# Altium PCB PrimaryConverterSch-PCB.PcbDoc
Units mm, origin at the board's own origin, x right, y up, seen from the top; angles counter-clockwise.
Board outline 79.76 x 126.49 mm, 2 copper layers (Top Layer, Bottom Layer); 83 components, 51 nets, 297 pads, 240 vias.
Unrouted connection lines stored in the file: 40.
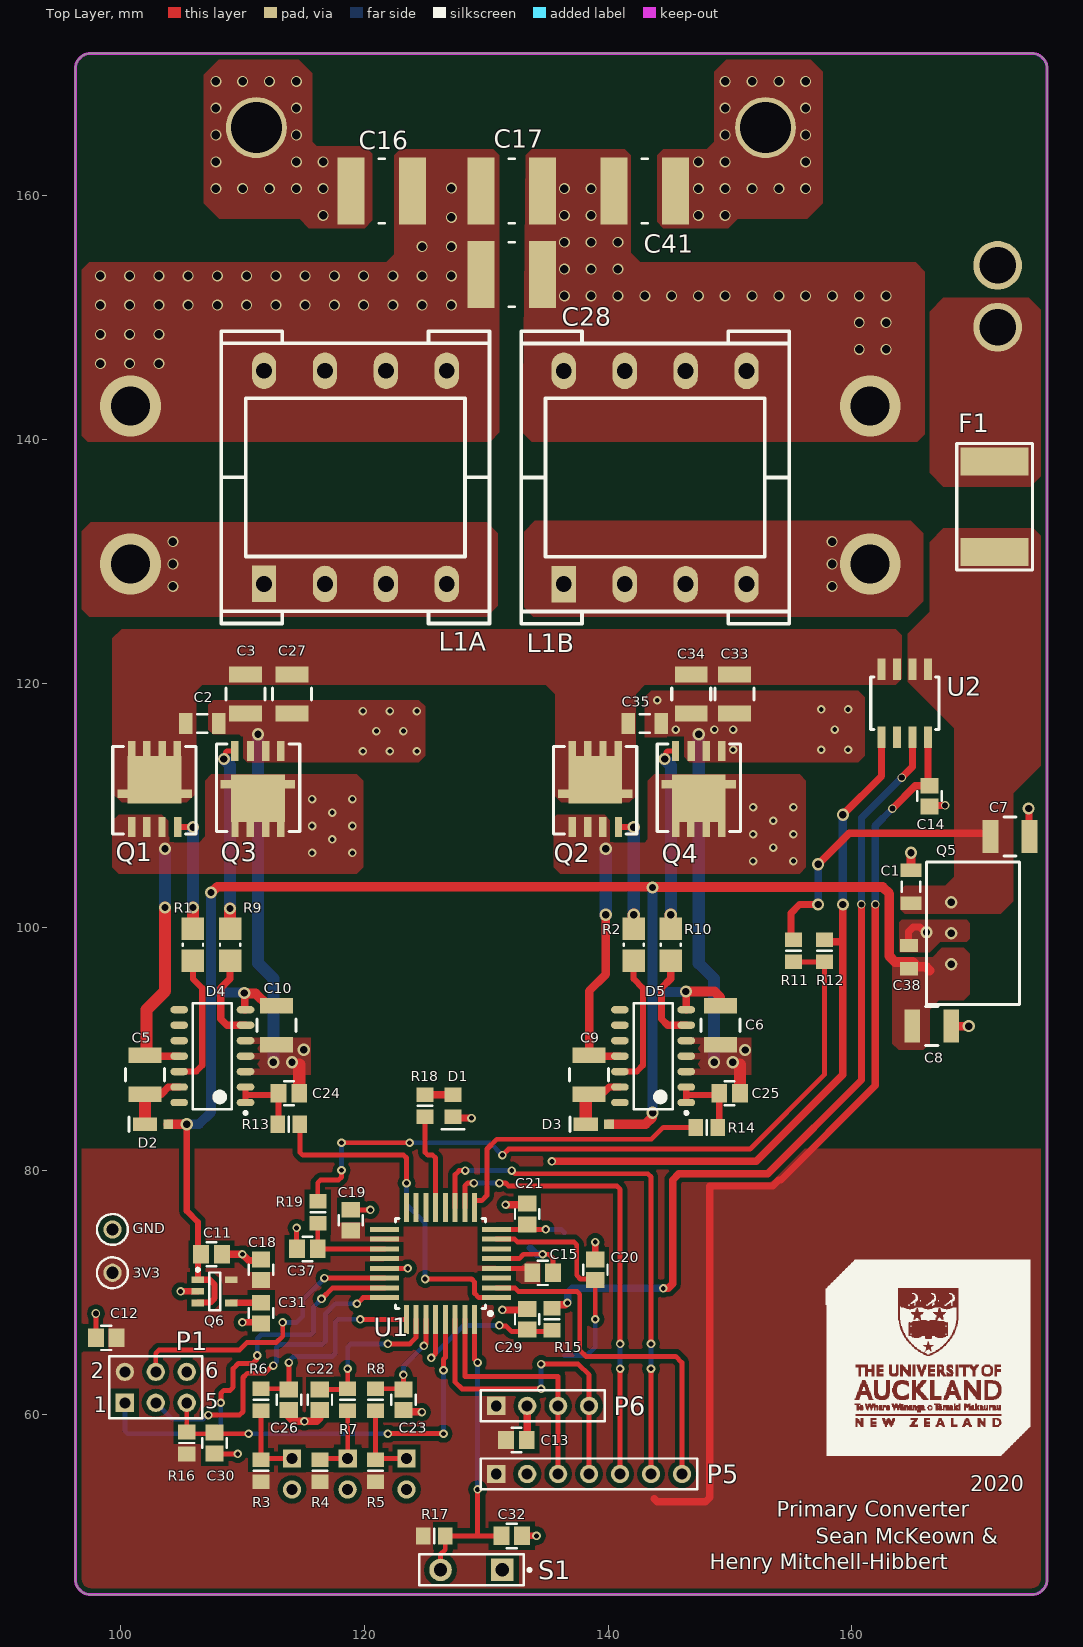
[diagram p0: Top Layer view]
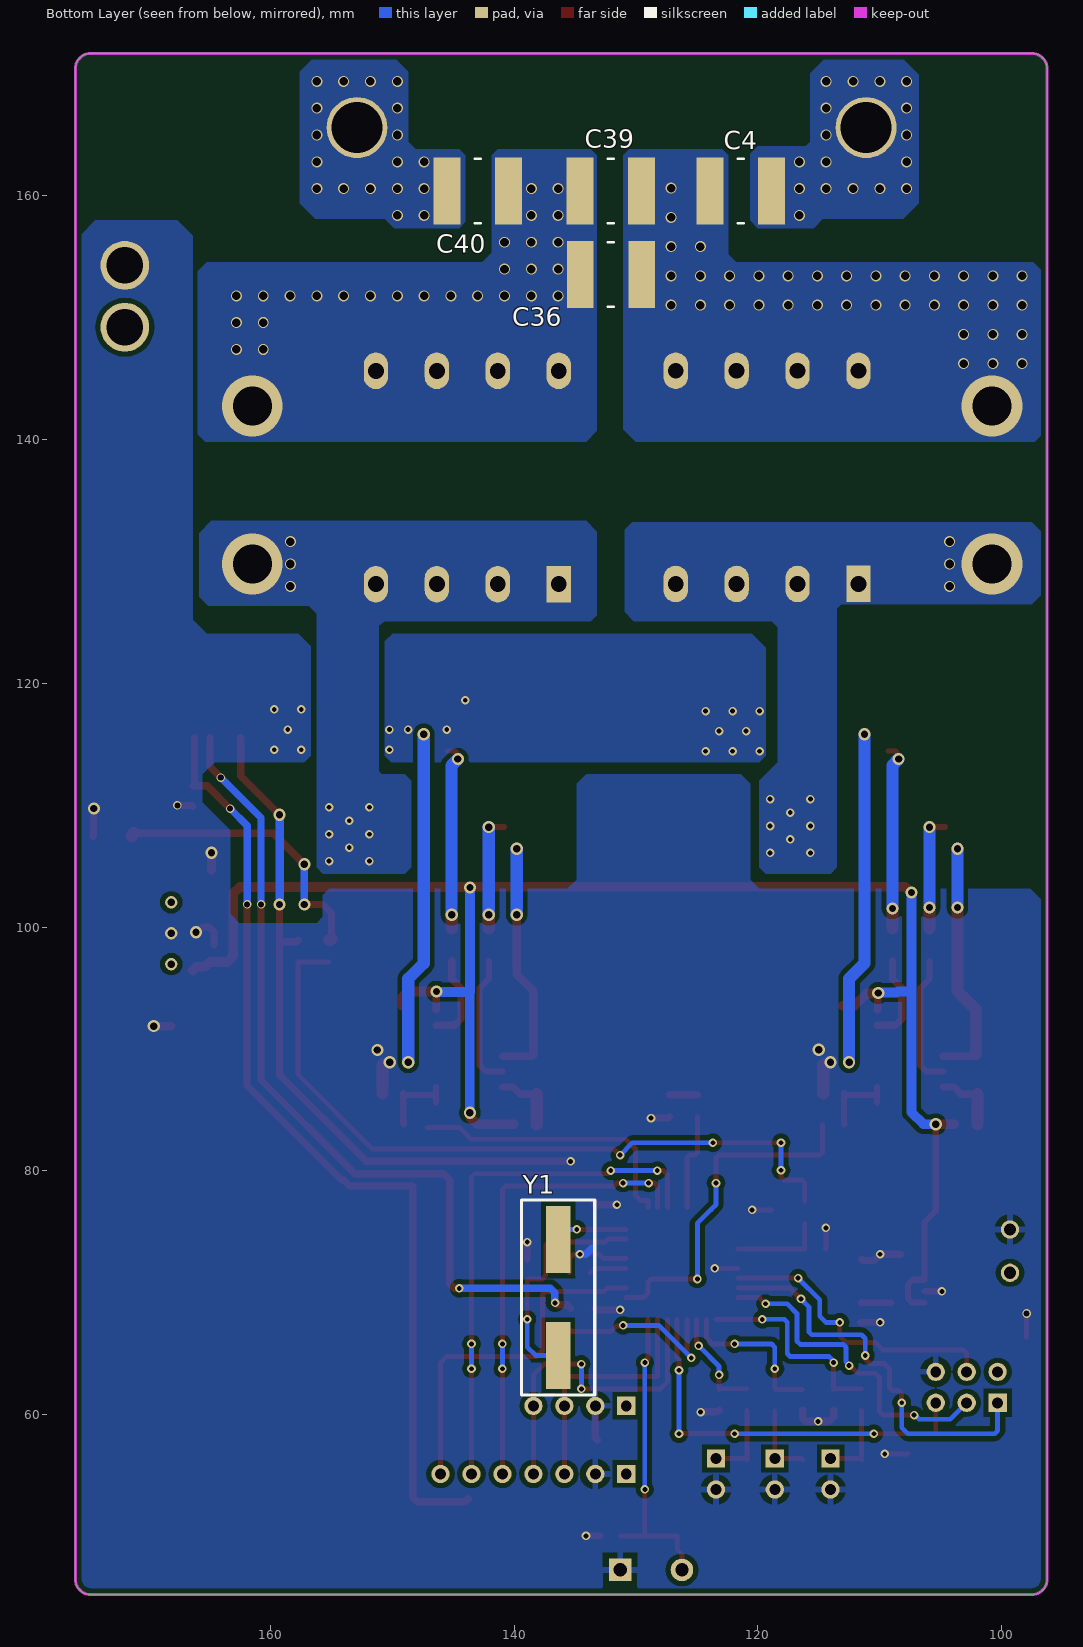
[diagram p1: Bottom Layer view, seen from below]
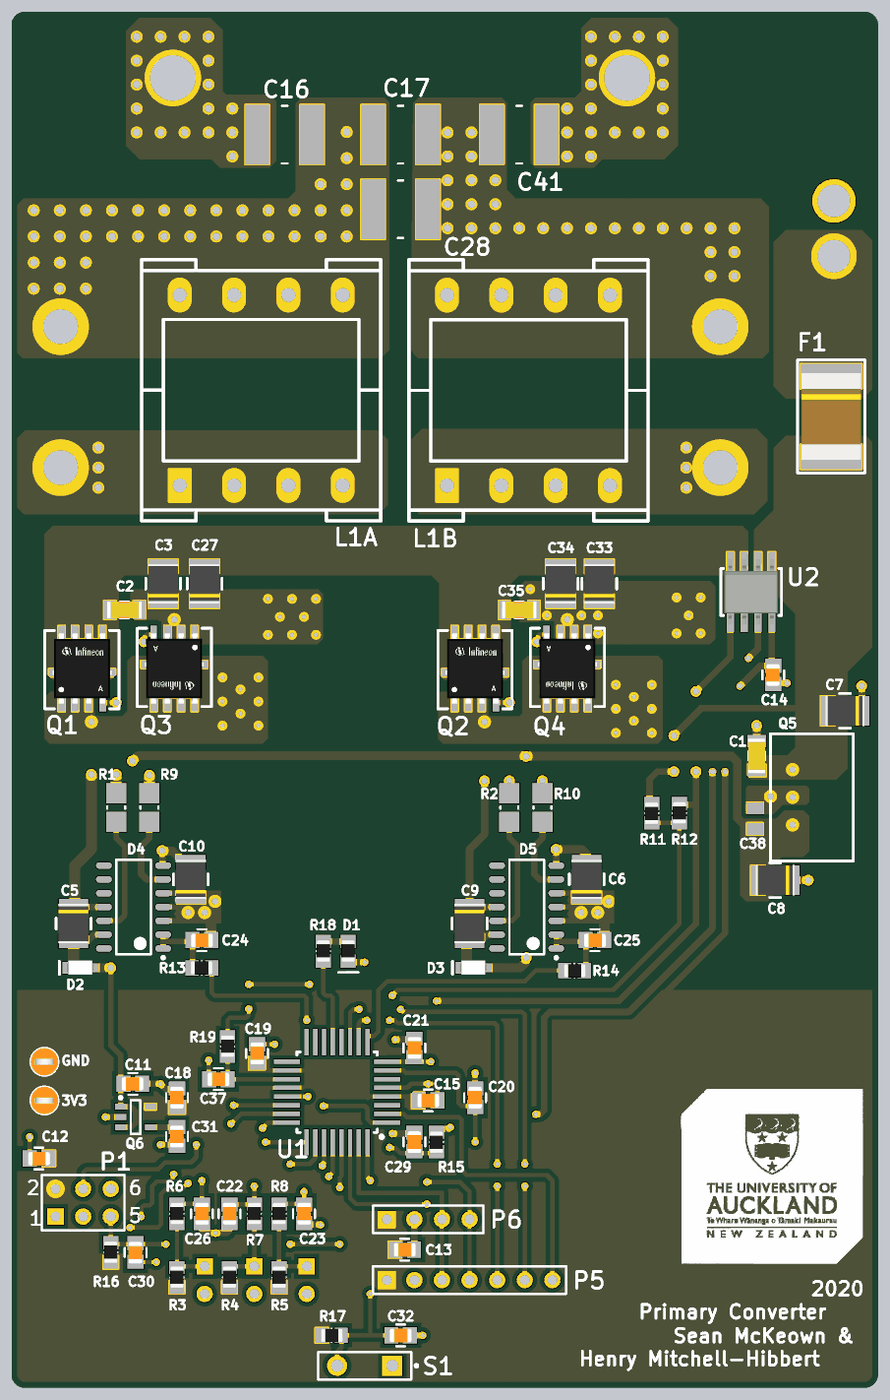
[diagram p2: 3D render of the assembled board from above, using the file's embedded part models]

## Layer stack, top to bottom
Top Solder: solder mask 0.0102, Solder Resist, Dk 3.5
Top Layer: signal copper 0.0356
Dielectric 1: dielectric 0.32, FR-4, Dk 4.8
Bottom Layer: signal copper 0.0356
Bottom Solder: solder mask 0.0102, Solder Resist, Dk 3.5

## Board outline
96.266,46.482 96.266,170.434 cw(c97.536,170.434) 97.536,171.704 174.752,171.704 cw(c174.752,170.434) 176.022,170.434 176.022,46.482 cw(c174.752,46.482) 174.752,45.212 97.536,45.212 cw(c97.536,46.482)

## Design rules (kind name [scope] priority, off if disabled: settings)
Clearance [All] p1: gap=0.4 ignorepadtopadclearanceinfootprint=FALSE
Height [All] p1: minheight=0 maxheight=100 prefheight=12.7
HoleSize [All] p1: absolutevalues=TRUE maxlimit=10 minlimit=0.4 maxpercent=80.000 minpercent=20.000
PolygonConnect PowerDevices [IsNamedPolygon('12V_L01_P034') or HasFootprint('BSC072N08NS5ATMA1_modified_v2') or HasFootprint('CUI_PJ-014CH-SMT-TR_PJ-014CH-SMT-TR') or HasFootprint('C1210') or InNet('D1') or InNet('D2') or InNet('IP-') or HasFootprint('C1206') or (IsVia and InNet('GND')) or InNet('50V') or HasFootprint('0ZCF Series') or InNet('3V3') or InComponent('C38') or InNet('INP') or HasPad('Free-INN') or InNet('NetC4_2') or InNet('NetC17_1') or InNet('Lpt1') or InNet('Lpt2') or HasFootprint('SRH05S12')] p1: connectstyle=Direct reliefconductorwidth=0.254 reliefentries=4 polygonreliefangle="90 Angle" airgapwidth=0.254
PolygonConnect [All] p2: connectstyle=Relief reliefconductorwidth=0.5 reliefentries=4 polygonreliefangle="90 Angle" airgapwidth=0.5
RoutingVias [All] p1: holewidth=0.711 width=1.27 viastyle="Through Hole" minholewidth=0.711 minwidth=1.27 maxholewidth=0.711 maxwidth=1.27
SilkToSilkClearance [All] p1: silktosilkclearance=0.1
SilkToSolderMaskClearance [IsPad] p1: minsilkscreentomaskgap=0.1 clearancetoexposedcopper=TRUE
SolderMaskExpansion [All] p1: expansion=0.102 istentingtop=FALSE
Width Main_Width [All] p1: maxlimit=10 minlimit=0.399 preferedwidth=0.4 checkconnectedcopper=TRUE
Width Gate_Trace_Width [(InNet('NetQ1_4') OR InNet('NetQ2_4') OR InNet('NetQ3_4') OR InNet('NetQ4_4') OR InNet('NetD4_6') OR InNet('NetD4_12') OR InNet('NetD5_6') OR InNet('NetD5_12'))] p2 off: maxlimit=10 minlimit=1 preferedwidth=1 checkconnectedcopper=TRUE
26 further rules are at their usual default settings.

## Components (designator, comment, footprint, x,y, rotation, side; value= is the part's Value field where it differs from the comment)
3V3 "5003" TP_TH 99.314,71.628 r180 top (schematic designator TP1)
C1 "100n" C1206 164.846,103.302 r270 top
C2 "Cap CER" C1206 106.68,116.713 r180 top value=100nF/100V
C3 "Cap CER" C1210 110.236,119.126 r90 top value=2200nF/100V
C4 "CCAP5750" C5750 121.412,160.401 r0 bottom
C5 "1uF" C1210 101.986,87.884 r270 top
C6 "10uF" C1210 149.2,91.948 r90 top
C7 "2u2" C1210 172.974,107.442 r180 top
C8 "2u2" C1210 166.548,91.872 r180 top
C9 "1uF" C1210 138.43,87.884 r270 top
C10 "10uF" C1210 112.776,91.948 r90 top
C11 "Capacitor 0805" C0805#1 107.442,73.152 r0 top value=1uF
C12 "Capacitor 0805" C0805#1 98.806,66.294 r180 top value=2.2uF
C13 "Capacitor 0805" C0805#1 132.461,57.912 r180 top value=?
C14 "Capacitor 0805" C0805#1 166.37,110.744 r90 top value=?
C15 "Capacitor 0805" C0805#1 134.62,71.628 r180 top value=?
C16 "CCAP5750" C5750 121.412,160.401 r0 top
C17 "CCAP5750" C5750 132.08,160.401 r180 top
C18 "Capacitor 0805" C0805#1 111.506,71.882 r270 top value=?
C19 "Capacitor 0805" C0805#1 118.872,75.946 r270 top value=?
C20 "20p0" C0805#1 138.938,71.882 r270 top
C21 "20p0" C0805#1 133.35,76.454 r270 top
C22 "Capacitor 0805" C0805#1 116.332,61.214 r270 top value=?
C23 "Capacitor 0805" C0805#1 123.19,61.214 r270 top value=?
C24 "4n7" C0805#1 113.792,86.36 r180 top
C25 "4n7" C0805#1 149.962,86.36 r180 top
C26 "Capacitor 0805" C0805#1 113.792,61.214 r270 top value=?
C27 "Cap CER" C1210 114.046,119.126 r90 top value=2200nF/100V
C28 "CCAP5750" C5750 132.08,153.543 r180 top
C29 "15n0" C0805#1 133.35,67.818 r90 top
C30 "18n0" C0805#1 107.696,57.658 r90 top
C31 "Capacitor 0805" C0805#1 111.506,68.326 r90 top value=100pF
C32 "18n0" C0805#1 132.08,50.038 r180 top
C33 "Cap CER" C1210 150.368,119.126 r90 top value=2200nF/100V
C34 "Cap CER" C1210 146.812,119.126 r90 top value=2200nF/100V
C35 "Cap CER" C1206 143.002,116.713 r180 top value=100nF/100V
C36 "CCAP5750" C5750 132.065,153.543 r180 bottom
C37 "Capacitor 0805" C0805#1 115.316,73.59 r180 top value=1uF
C38 "100n0" C0805#2 164.685,97.536 r270 top
C39 "CCAP5750" C5750 132.08,160.401 r180 bottom
C40 "CCAP5750" C5750 143.002,160.401 r180 bottom
C41 "CCAP5750" C5750 143.002,160.401 r180 top
D1 "LED" LED0805 127.254,85.344 r270 top
D2 "MSS1P6-M3/89A" "MicroSMP (DO-219AD)" 102.936,83.82 r0 top
D3 "MSS1P6-M3/89A" "MicroSMP (DO-219AD)" 139.106,83.82 r0 top
D4 "IRS21834" IRS21834 107.511,89.408 r180 top
D5 "IRS21834" IRS21834 143.681,89.408 r180 top
F1 "Fuse Resettable" "0ZCF Series" 171.704,134.493 r270 top value=60V/1A
GND "5003" TP_TH 99.314,75.184 r180 top (schematic designator TP2)
L1A "Inductor" EFD20 119.253,136.906 r90 top
L1B "Inductor" EFD20 143.851,136.893 r90 top
P1 "ISP Programmer" HDR2X3 100.33,60.96 r0 top
P5 "BLE Headers" HDR1X7 130.81,55.118 r0 top
P6 "Header 4" HDR1X4 130.81,60.706 r0 top
Q1 "NMOS" BSC072N08NS5ATMA1_modified_v2 102.768,111.328 r0 top
Q2 "NMOS" BSC072N08NS5ATMA1_modified_v2 138.938,111.328 r0 top
Q3 "NMOS" BSC072N08NS5ATMA1_modified_v2 111.252,111.328 r180 top
Q4 "NMOS" BSC072N08NS5ATMA1_modified_v2 147.422,111.328 r180 top
Q5 "SRH05S12" SRH05S12 168.148,99.492 r270 top
Q6 "3V3 Reg" 3V3 107.696,70.104 r0 top
R1 "Resistor 1206" R1206 105.918,98.552 r90 top value=?
R2 "Resistor 1206" R1206 142.088,98.552 r90 top value=?
R3 "Resistor 0805" R0805 111.506,55.372 r270 top value=?
R4 "Resistor 0805" R0805 116.332,55.372 r270 top value=?
R5 "Resistor 0805" R0805 120.904,55.372 r270 top value=?
R6 "Resistor 0805" R0805 111.506,61.214 r270 top value=?
R7 "Resistor 0805" R0805 118.618,61.214 r270 top value=?
R8 "Resistor 0805" R0805 120.904,61.214 r270 top value=?
R9 "Resistor 1206" R1206 108.966,98.552 r90 top value=?
R10 "Resistor 1206" R1206 145.136,98.552 r90 top value=?
R11 "Resistor 0805" R0805 155.194,98.044 r90 top value=?
R12 "Resistor 0805" R0805 157.734,98.044 r270 top value=?
R13 "100R0" R0805 113.792,83.82 r0 top
R14 "100R0" R0805 148.082,83.566 r180 top
R15 "1k0" R0805 135.382,67.818 r90 top
R16 "18k0" R0805 105.41,57.658 r270 top
R17 "18k0" R0805 125.73,50.038 r180 top
R18 "150R0" R0805 124.968,85.344 r270 top
R19 "Resistor 0805" R0805 116.166,76.592 r270 top value=?
S1 "SW-PB" SPST-2 128.778,47.244 r180 top
U1 "ATMega328PB" TQFP32 126.238,72.39 r180 top
U2 "ACS70331_SOIC" ACS70331 164.338,118.364 r270 top
Y1 "SMT-XTAL 16MHz" HC49-US 136.398,69.596 r90 bottom

## Footprints (in the part's own frame and the unit in brackets; to place one, negate y for a bottom-side part, rotate by r counter-clockwise, add the part's x,y. Pads: shape width x height; smd on the part's side, far side on the other; paste and mask are expansions set on the pad)
"0ZCF Series" [mm] "0ZCF Series SMD Reset Fuse"
  rect 2.3x5.6 smd: 1(-3.7,0) 2(3.7,0)
  silkscreen extent -5.2,-3.1 5.2,3.1, body extent -3.99,-2.72 3.99,2.72, height 1.15
3V3 [mm] "SOT23, 5-Leads, Body 2.96x2.83mm, Pitch 0.95mm, IPC Medium Density"
  rect 1.05x0.55 smd: 1(-1.375,0.95) 2(-1.375,0) 3(-1.375,-0.95) 4(1.375,-0.95) 5(1.375,0.95)
  silkscreen extent -1.5,-1.55 0.45,1.9, body extent -0.85,-1.55 0.85,1.55, height 1.45
ACS70331 [mm] "8-SOIC model; 8 leads"
  rect 1.75x0.65 smd: 1(-2.8,1.905) 2(-2.8,0.635) 3(-2.8,-0.635) 4(-2.8,-1.905) 5(2.8,-1.905) 6(2.8,-0.635) 7(2.8,0.635) 8(2.8,1.905)
  silkscreen extent -2.16,-2.79 2.16,2.79, body extent -3,-2.45 3,2.45, height 1.57
BSC072N08NS5ATMA1_modified_v2 [mil]
  rect 23.94x65 smd: 1(-74,-123) 1(-25,-123) 1(24,-123) 4(75,-123) 8(-74,123) 8(-25,123) 8(25,123) 8(74,123)
  rect 65x27.87 smd: 8(-88,-15) 8(88,-15)
  rect 173.62x153.54 smd: 8(0,30.26)
  silkscreen extent -135,-146 134,138, body extent -106,-127 107,127, height 40
C0805#1 [mm]
  rect 1.3x1.5 smd: 1(-0.85,0) 2(0.85,0)
  silkscreen extent -0.4,-1 0.4,1, body extent -1.03,-0.63 1,0.64, height 0.65
C0805#2 [mm]
  rect 1.1x1.5 smd: 1(-0.95,0) 2(0.95,0)
  body extent -1.1,-0.72 1.1,0.72, height 1.1
C1206 [mm] "Chip Capacitor, Body 3.2x1.6mm, IPC High Density"
  rect 1.1x1.7 smd: 1(-1.35,0) 2(1.35,0)
  silkscreen extent -0.4,-0.75 0.4,0.75, body extent -1.6,-0.8 1.6,0.8, height 1.5
C1210 [mm]
  rect 1.3x2.7 smd: 1(-1.6,0) 2(1.6,0)
  silkscreen extent -0.5,-1.6 0.5,1.6, body extent -1.8,-1.4 1.8,1.4, height 1.24
C5750 [mm] "C5750 footprint"
  rect 2.2x5.5 smd: 1(-2.525,0) 2(2.525,0)
  silkscreen extent -0.25,-2.65 0.25,2.65, body extent -3.05,-2.7 3.05,2.7, height 3.2
EFD20 [mm]
  rect 3x2 hole 1.3: 1(-8.75,7.5)
  oval 3x2 hole 1.3: 2(-8.75,2.5) 3(-8.75,-2.5) 4(-8.75,-7.5) 5(8.75,-7.5) 6(8.75,-2.5) 7(8.75,2.5) 8(8.75,7.5)
  silkscreen extent -12,-11 12,11
HC49-US [mm] "20Mhz Crystal"
  rect 5.5x2 smd: 1(-4.75,0) 2(4.75,0)
  silkscreen extent -8,-3 8,3, body extent -4.79,-2.4 4.79,2.4, height 3.8
HDR1X4 [mm] "Connector; Header; 4 Position"
  rect 1.5x1.5 hole 0.9: 1(0,0)
  round 1.5 hole 0.9: 2(2.54,0) 3(5.08,0) 4(7.62,0)
  silkscreen extent -1.27,-1.27 8.89,1.27
HDR1X7 [mm] "Connector; Header; 7 Position"
  rect 1.5x1.5 hole 0.9: 1(0,0)
  round 1.5 hole 0.9: 2(2.54,0) 3(5.08,0) 4(7.62,0) 5(10.16,0) 6(12.7,0) 7(15.24,0)
  silkscreen extent -1.27,-1.27 16.51,1.27
HDR2X3 [mm] "Connector; Header; 3x2 Position"
  rect 1.5x1.5 hole 0.9: 1(0,0)
  round 1.5 hole 0.9: 2(0,2.54) 3(2.54,0) 4(2.54,2.54) 5(5.08,0) 6(5.08,2.54)
  silkscreen extent -1.27,-1.27 6.35,3.81
IRS21834 [mm] "IRS21834 HALF-BRIDGE 600V FET DRIVER"
  oval 1.45x0.6 smd: 1(-2.725,3.81) 2(-2.725,2.54) 3(-2.725,1.27) 4(-2.725,0) 5(-2.725,-1.27) 6(-2.725,-2.54) 7(-2.725,-3.81) 8(2.725,-3.81) 9(2.725,-2.54) 10(2.725,-1.27) 11(2.725,0) 12(2.725,1.27) 13(2.725,2.54) 14(2.725,3.81)
  silkscreen extent -2.85,-4.35 1.6,4.78, body extent -2,-4.35 2,4.35, height 1.75
LED0805 [mm]
  rect 1.2x1.4 smd: 1(-0.9,0) 2(0.9,0)
  silkscreen extent 1.94,-0.91 1.94,0.94, body extent -1.04,-0.63 0.99,0.64, height 0.6
"MicroSMP (DO-219AD)" [mm]
  rect 0.8x0.8 smd: 1(0.95,0)
  rect 2x1.1 smd: 2(-0.95,0)
  silkscreen extent -2.25,-0.6 -2.25,0.6, body extent -1.58,-0.64 0.92,0.66, height 0.66
R0805 [mm]
  rect 1.2x1.4 smd: 1(-0.9,0) 2(0.9,0)
  silkscreen extent 0,-0.6 0,0.6, body extent -1.04,-0.63 0.99,0.64, height 0.6
R1206 [mm] "Chip Resistor, 2-Leads, Body 3.20x1.60mm, IPC Low Density"
  rect 1.85x1.85 smd: 1(-1.325,0) 2(1.325,0)
  silkscreen extent -0.1,-0.82 0.1,0.82, body extent -1.7,-0.87 1.7,0.87, height 0.65
SPST-2 [mm] "Switch; 2 Leads"
  rect 1.85x1.85 hole 1.1: 1(-2.54,0)
  round 1.85 hole 1.1: 2(2.54,0)
  silkscreen extent -4.89,-1.27 4.28,1.27
SRH05S12 [mil] "DC-DC Regulator 12V Out TH"
  round 40 hole 23: 0(-100,0) 1(0,0) 2(100,0)
  silkscreen extent -230,-80 230,220, body extent -230,-80 230,220, height 380
TP_TH [mm] "Test Point, Through Hole, Dia 2.54mm"
  round 1.5 hole 1: 1(0,0)
  silkscreen extent -1.27,-1.27 1.27,1.27, body extent -1.27,-1.27 1.27,1.27, height 4.57
TQFP32 [mm]
  rect 2.4x0.4 smd: 1(-4.6,2.8) 2(-4.6,2) 3(-4.6,1.2) 4(-4.6,0.4) 5(-4.6,-0.4) 6(-4.6,-1.2) 7(-4.6,-2) 8(-4.6,-2.8) 17(4.6,-2.8) 18(4.6,-2) 19(4.6,-1.2) 20(4.6,-0.4) 21(4.6,0.4) 22(4.6,1.2) 23(4.6,2) 24(4.6,2.8)
  rect 0.4x2.4 smd: 9(-2.8,-4.6) 10(-2,-4.6) 11(-1.2,-4.6) 12(-0.4,-4.6) 13(0.4,-4.6) 14(1.2,-4.6) 15(2,-4.6) 16(2.8,-4.6) 25(2.8,4.6) 26(2,4.6) 27(1.2,4.6) 28(0.4,4.6) 29(-0.4,4.6) 30(-1.2,4.6) 31(-2,4.6) 32(-2.8,4.6)
  silkscreen extent -4.24,-3.7 3.7,4.24, body extent -3.5,-3.5 3.5,3.5, height 1.3

## Part data
3V3 GND: library part TestPoint, "Test Point, Orange, 1-Pin THD, RoHS", Forward Current="3 A", Forward Voltage="1.08 V", Max Operating Temperature="150 degC", Max Surge Current="80 A", Min Operating Temperature="-65 degC", Package Quantity=500, Peak Reverse Current="600 uA", ComponentLink1Description="Manufacturer URL", ComponentLink1URL=http://www.keyelco.com/, ComponentLink2Description=Datasheet, ComponentLink2URL=http://keyelco.com/userAssets/file/M65p56.pdf, DatasheetVersion=Jun-15, Diameter="5.3 mm", Height="0.25 inch", Length="9.5 mm", Mount="Through Hole", PackageDescription="1-Pin Through Hole Device, Dia 2.54 mm", PackageReference=5003, Packaging=Bulk, Pins=2, Radiation Hardening=No, REACH SVHC="No SVHC", RoHSCompliant=true, Weight="0.01 lb", Width="0.25 inch"
C1 C2 C35: library part "Cap CER Decoup C3216C0G2A104J160AC", "CAP CER 0.1UF 100V C0G 1206", Manufacturer="TDK Corporation", MPN=C3216C0G2A104J160AC, Supplier Part Number 1=1795799, Part Description="CAP CER 0.1UF 100V C0G 1206", Supplier 1=RSComponents, Supplier 2=Element14, Supplier 3=Digi-Key, Supplier 4=Mouser, Supplier Part Number 2=2906828, Supplier Part Number 3=445-172677-1-ND, Supplier Part Number 4=810-C3216C0G2A104J6C, Type="Surface mount"
C3 C27 C33 C34: library part "Cap CER HF DC-Link CL32B225KCJSNNE", "CAP CER 2.2UF 100V X7R 1210", Manufacturer="AVX Corporation", MPN=CL32B225KCJSNNE, Supplier Part Number 1=1276-3362-1-ND, Part Description="CAP CER 2.2UF 100V X7R 1210", Supplier 1=Digi-Key, Supplier 2=Arrow, Supplier Part Number 2=CL32B225KCJSNNE, Type="Surface mount"
C4 C16 C17 C28 C36 C39 C40 C41: "CCAP1210"
C5 C6 C9 C10: library part CCAP1210, "CCAP1210", MPN=?, Part Description=?, Type="Surface Mount"
C7 C8: library part CCAP1210, "CCAP1210"
C11 C12 C13 C14 C15 C18 C19 C20 C21 C22 C23 C24 C25 C26 C29 C30 C31 C32 C37: library part CCAP0805, "CCAP0805", MPN=?, Part Description=?, Type="Surface Mount"
C38: library part CCAP0805, "CCAP0805"
D1: Manufacturer=?, MPN=?, Package=?, Type="Surface Mount"
D2 D3: library part "Diode MSS1P6-M3/89A", "DIODE SCHOTTKY 60V 1A MICROSMP", Manufacturer="Vishay Semiconductor Diodes Division", Supplier Part Number 1=7103070P, MPN=MSS1P6-M3/89A, Part Description="DIODE SCHOTTKY 60V 1A MICROSMP", Supplier 1=RSComponents, Supplier 2=Element14, Supplier Part Number 2=2335157, Type="Surface mount"
D4 D5: "IRS21834 HALF-BRIDGE 600V FET DRIVER", ComponentLink1Description=Datasheet, ComponentLink1URL=https://www.infineon.com/dgdl/irs2183.pdf?fileId=5546d462533600a401535676d20c27d8
F1: library part "FuseResettable 0ZCF0100AF2A", "PTC RESET FUSE 60V 1A 2920", Manufacturer="Bel Fuse Inc.", MPN=0ZCF0100AF2A, Supplier Part Number 1=507-2070-1-ND, Part Description="PTC RESET FUSE 60V 1A 2920", Supplier 1=Digi-Key, Supplier 2=Mouser, Supplier Part Number 2=530-0ZCF0100AF2A, Type="Surface mount"
L1A L1B: library part "Inductor EFD20", "Inductor with core"
P1: library part "Header 3X2", "Header, 3-Pin, Dual row", LatestRevisionDate=17-Jul-2002, LatestRevisionNote="Re-released for DXP Platform.", Publisher="Altium Limited"
P5: library part "Header 7", "Header, 7-Pin", LatestRevisionDate=17-Jul-2002, LatestRevisionNote="Re-released for DXP Platform.", Publisher="Altium Limited"
P6: "Header, 4-Pin", LatestRevisionDate=17-Jul-2002, LatestRevisionNote="Re-released for DXP Platform.", Publisher="Altium Limited"
Q1 Q2 Q3 Q4: library part "NMOS OptiMOS BSC072N08NS5ATMA1", "MOSFET N-CH 80V 74A 8TDSON", Manufacturer="Infineon Technologies", MPN=BSC072N08NS5ATMA1, Supplier Part Number 1=2725812, Part Description="MOSFET N-CH 80V 74A 8TDSON", Supplier 1=Element14, Supplier 2=Digi-Key, Supplier 3=Mouser, Supplier Part Number 2=BSC072N08NS5ATMA1CT-ND, Supplier Part Number 3=726-BSC072N08NS5ATMA, Type="Surface mount"
Q5: "DC-DC Regulator 12V Out TH", ComponentLink1Description=Datasheet, ComponentLink1URL=https://www.xppower.com/portals/0/pdfs/SF_SRH05.pdf
R1 R2 R9 R10: library part RES1206, "RES1206", MPN=?, Part Description=?, Type="Surface Mount"
R3 R4 R5 R6 R7 R8 R11 R12 R13 R14 R15 R16 R17 R18 R19: library part RES0805, "RES0805", MPN=?, Part Description=?, Type="Surface Mount"
S1: "Switch", LatestRevisionDate=17-Jul-2002, LatestRevisionNote="Re-released for DXP Platform.", PackageDescription="Switch; 2 Leads", PackageReference=SPST-2, Published=24-Mar-1999, Publisher="Altium Limited"
U1: "IC MCU 8BIT 32KB FLASH 32TQFP", Supplier Part Number 1=ATMEGA328PB-AU-ND, Supplier 1=Digi-Key, Supplier 2=Digikey, Supplier Part Number 2=ATMEGA328PB-AU-ND
U2: library part ACS70331, "1MHz high sensitivity current sensor"
Y1: library part TXC9C-16_XTAL_SMT, "9C-16.000MAAJ-T crystal 16.0000MHZ 18PF SMD", Frequency Stability=±30ppm, Load Capacitance=18pF, Manufacturer="TXC CORPORATION", Manufacturer Part Number=9C-16.000MAAJ-T, Operating Mode=Fundamental, Operating Temperature="-20°C ~ 70°C", Package / Case=HC-49/US, Ratings=-, Supplier Part Number 1=887-1059-1-ND, Category="Crystals, Oscillators, Resonators", ComponentLink1Description=http://www.txccorp.com/download/products/quartz_crystals/2015TXC_9C_32.pdf, ComponentLink1URL=http://www.txccorp.com/download/products/quartz_crystals/2015TXC_9C_32.pdf, Frequency Tolerance=±30ppm, Height - Seated (Max)="0.161\" (4.10mm)", Mounting Type="Surface Mount", Packaging="Cut Tape (CT)", Part Status=Active, Pricing 1="1=0.75, 10=0.628, 50=0.5656, 100=0.5026, 500=0.47744 (NZD)", RoHS="RoHS Compliant", Size / Dimension="0.449\" L x 0.189\" W (11.40mm x 4.80mm)", Stock 1=11514, Supplier 1=Digi-Key, Type="MHz Crystal"

## Free pads (board coordinates)
  round 5 hole 4.2: 1(111.125,165.608) 2(152.908,165.608)
  round 4 hole 3: 2(171.958,149.225) INN(171.958,154.305)
  round 1.5 hole 0.9: 3(114.046,53.848) 3(118.618,53.848) 3(123.444,53.848)
  rect 1.5x1.5 hole 0.9: 3(114.046,56.388) 4(118.618,56.388) 5(123.444,56.388)

## Via types
v1: diameter 0.9, hole 0.7, Top Layer to Bottom Layer, 104 vias
v2: diameter 0.7, hole 0.4, Top Layer to Bottom Layer, 92 vias
v3: diameter 1, hole 0.6, Top Layer to Bottom Layer, 34 vias
v4: diameter 0.7, hole 0.5, Top Layer to Bottom Layer, 6 vias
v5: diameter 5, hole 3.2, Top Layer to Bottom Layer, 4 vias

## Nets (pads, with @x,y where several pads share a name; then routed paths per layer and width w, separated by ;. In a path a pad name is that pad's centre, name@x,y a point inside that pad or via, vN(x,y) a via of type N, cw(c..) or ccw(c..) an arc to the next point about the centre after c; other vN are vias at no path point)
3V3: 3V3.1 C12.1 C13.2 C14.2 C15.2 C18.2 C19.2 P1.2 P5.1 P6.1 Q6.5 R3.2 R4.2 R5.2 R16.2 R17.2 U1.4 U1.18 U1.20 U2.8 | length 81.5
  Top Layer w0.4: U1.4 133.408,71.99 C15.2
  Top Layer w0.6: 143.764,53.086 144.018,52.832 147.985,52.832 148.336,53.183 148.336,78.756 153.495,78.756 153.987,79.248 154.178,79.248 161.925,86.995 161.925,101.847 v4(161.918,101.854) ; v4(163.322,109.72) 165.196,111.594 C14.2 ; C14.2@166.243,111.649 U2.8
  Bottom Layer w0.6: v4(161.918,101.854) 161.918,108.324 v4@163.28,109.686
12V: C6.2 C8.2 C10.2 C11.1 C38.2 D2.1 D3.1 D4.7 D5.7 Q5.2 Q6.1 Q6.3 | length 142.5
  Top Layer w0.5: v3(105.41,83.82) 105.41,76.708 106.321,75.797 106.321,73.152 Q6.1 107.299,71.054 107.696,70.657 107.696,69.551 107.324,69.179 106.346,69.179 Q6.3
  Top Layer w0.6: v3(110.128,94.594) 110.182,94.539 110.182,93.218 D4.7 ; D5.7 v3@146.406,94.674
  Top Layer w0.8: D2.1 v3(105.41,83.82) ; v3(107.403,102.831) 107.457,102.831 107.943,103.317 113.538,103.317 ; v3(110.128,94.594) 110.166,94.555 111.069,94.555 112.076,93.548 C10.2@113.03,93.548 ; 113.599,103.317 143.477,103.317 cw(c143.477,103.091) v3(143.637,103.251) 143.674,103.288 162.523,103.288 163.068,102.743 163.068,97.605 163.537,97.136 164.992,97.136 165.392,96.736 166.07,96.736 166.37,96.436 ; D3.1 143.074,83.82 143.604,84.35 143.604,84.722 v3(143.642,84.76) ; v3@146.406,94.674 v3(146.374,94.706) 148.728,94.706 149.2,94.234 C6.2
  Bottom Layer w0.8: v3(105.41,83.82) 106.426,83.82 107.403,84.797 107.403,94.706 ; v3(107.403,102.831) 107.403,94.706 ; v3(110.128,94.594) 110.09,94.632 108.608,94.632 108.534,94.706 107.403,94.706 ; v3(143.637,103.251) 143.637,94.675 143.642,94.67 ; v3(143.642,84.76) 143.642,94.67 ; v3@146.444,94.67 143.642,94.67
50V: C1.2 C7.2 F1.2 Q5.0 R11.2 U2.1 U2.2 | length 23.5
  Top Layer w0.6: R11.2@154.994,99.044 154.994,101.146 155.702,101.854 v3(157.226,101.854) ; v3(157.226,105.156) 159.766,107.696 C7.2@171.224,107.696
  Top Layer w1: R11.2@154.994,99.044 155.094,98.944 R11.2 ; C7.2@171.224,107.696 171.374,107.546 C7.2
  Bottom Layer w0.6: v3(157.226,101.854) v3(157.226,105.156)
D1: C5.1 D4.11 L1A.1 L1A.2 L1A.3 L1A.4 Q1.1 Q3.8 | length 20.5
  Top Layer w0.5: C5.1 C5.1@102.108,89.606
  Top Layer w0.6: C5.1 102.062,89.408 D4.11
  Top Layer w1: C5.1@102.108,89.606 102.108,93.218 103.632,94.742 v3(103.632,101.6)
  Bottom Layer w1: v3(103.632,101.6) v3(103.632,106.426)
  other v1: 104.267,127.953 104.267,129.794 104.267,131.636
  other v2: 115.697,106.082 118.999,106.082 117.348,107.188 115.697,108.294 118.999,108.294 117.348,109.399 115.697,110.505 118.999,110.505
  other v5: 100.8,129.794
D2: C9.1 D5.11 L1B.1 L1B.2 L1B.3 L1B.4 Q2.1 Q4.8 | length 20.1
  Top Layer w0.6: C9.1 138.506,89.408 D5.11
  Top Layer w0.7: C9.1 138.43,94.742 139.802,96.114 v3(139.802,101.009)
  Bottom Layer w1: v3(139.802,101.009) v3(139.802,106.426)
  other v1: 158.369,127.953 158.369,129.794 158.369,131.636
  other v2: 151.892,105.41 155.194,105.41 153.543,106.516 151.892,107.621 155.194,107.621 153.543,108.727 151.892,109.833 155.194,109.833
  other v5: 161.5,129.794
GND: C1.1 C2.1 C3.1 C6.1 C7.1 C8.1 C10.1 C11.2 C12.2 C13.1 C14.1 C15.1 C18.1 C19.1 C20.1 C21.1 C22.2 C23.2 C24.1 C25.1 C26.2 C27.1 C29.2 C30.1 C31.1 C32.1 C33.1 C34.1 C35.1 C37.2 C38.1 D1.2 D4.3 D4.4 D4.5 D5.3 D5.4 D5.5 GND.1 P1.6 P5.2 P6.2 pad.3@114.046,53.848 pad.3@118.618,53.848 pad.3@123.444,53.848 pad.INN Q3.1 Q4.1 Q5.1 Q6.2 R12.1 S1.1 U1.5 U1.21 U2.5 | length 166.1
  Top Layer w0.399: C12.2 v4(97.956,68.287) ; C30.1 107.735,56.769 v2(109.601,56.769) ; v2(114.427,75.311) 114.427,73.629 C37.2 ; C19.1 v2(120.484,76.796) ; U1.21 v2(123.552,71.99)
  Top Layer w0.4: U1.5 132.683,72.79 133.045,73.152 v2(134.62,73.152) 135.128,73.152 135.47,72.81 C15.1
  Top Layer w0.55: v2(104.911,70.104) Q6.2 ; v2(109.982,67.564) 111.594,67.564 C31.1 ; C32.1 v2(134.112,50.038) ; C20.1 v2(138.938,74.142)
  Top Layer w0.6: C11.2 v2(109.982,73.152) 110.49,72.644 111.418,72.644 C18.1 ; C26.2 113.792,59.787 114.124,59.455 115.043,59.455 v2(115.062,59.436) 115.081,59.455 116.097,59.455 116.332,59.69 C22.2 ; C23.2 123.337,60.217 124.695,60.217 v2(124.714,60.198) ; D1.2 127.37,84.328 v2(128.778,84.328) ; v2(131.318,68.58) 133.262,68.58 C29.2 ; v2(131.572,77.216) C21.1@133.357,77.216 ; C13.1@133.184,57.912 133.35,58.078 P6.2 ; C21.1 C21.1@133.363,77.291 ; v2(135.382,80.772) 152.146,80.772 159.258,87.884 159.258,98.806 ; R12.1 157.872,98.806 159.258,98.806 ; v3(159.258,101.854) 159.258,98.806 ; v3(159.258,109.22) 162.433,112.395 U2.5 ; C38.1@164.638,98.532 164.638,99.614 165.024,99.999 165.561,99.999 165.993,99.568 v3(166.116,99.568) ; C14.1 166.458,109.982 v4(167.64,109.982) ; v3(174.498,109.728) 174.536,109.69 174.536,107.48 C7.1
  Top Layer w0.7: C1.1 v3(164.846,106.096) ; C8.1 v3(169.592,91.872)
  Top Layer w1: C24.1 114.642,88.734 ; C25.1 150.812,88.734
  Bottom Layer w0.6: 133.604,73.66 134.112,73.152 v2(134.62,73.152)
  Bottom Layer w0.7: v3(159.258,101.854) v3(159.258,109.22)
  Bottom Layer w1: v3(111.252,115.824) 111.252,97.028 112.522,95.758 v3(112.522,88.9) ; v3(147.422,115.824) 147.422,97.028 148.692,95.758 v3(148.692,88.9)
  other v2: 119.873,114.427 122.084,114.427 124.296,114.427 150.241,114.554 157.48,114.554 159.691,114.554 120.979,116.078 123.19,116.078 145.542,116.205 148.717,116.205 150.241,116.205 158.586,116.205 119.873,117.729 122.084,117.729 124.296,117.729 157.48,117.856 159.691,117.856 144.018,118.618
  other v3: 114.046,88.9 150.216,88.9 115.011,89.929 151.232,89.916
INP: F1.1 pad.2@171.958,149.225
IP-: C2.2 C3.2 C27.2 C33.2 C34.2 C35.2 Q1.8 Q2.8 U2.3 U2.4
Lpt1: C4.1 C16.1 pad.1
  other v1: 116.6,158.4 107.8,160.6 110,160.6 112.2,160.6 114.4,160.6 116.6,160.6 107.8,162.8 114.4,162.8 116.6,162.8 107.8,165 114.4,165 107.8,167.2 114.4,167.2 107.8,169.4 110,169.4 112.2,169.4 114.4,169.4
Lpt2: C40.1 C41.1 pad.2@152.908,165.608
  other v1: 147.4,158.4 149.6,158.4 147.4,160.6 149.6,160.6 151.8,160.6 154,160.6 156.2,160.6 147.4,162.8 149.6,162.8 156.2,162.8 149.6,165 156.2,165 149.6,167.2 156.2,167.2 149.6,169.4 151.8,169.4 154,169.4 156.2,169.4
NetC4_2: C4.2 C16.2 C17.2 C28.2 C36.2 C39.2 L1A.5 L1A.6 L1A.7 L1A.8
  other v1: 98.324,146.24 100.724,146.24 103.124,146.24 98.324,148.641 100.724,148.641 103.124,148.641 98.324,151.041 100.724,151.041 103.124,151.041 105.524,151.041 107.924,151.041 110.324,151.041 112.724,151.041 115.124,151.041 117.524,151.041 119.924,151.041 122.324,151.041 124.724,151.041 127.124,151.041 98.324,153.441 100.724,153.441 103.124,153.441 105.524,153.441 107.924,153.441 110.324,153.441 112.724,153.441 115.124,153.441 117.524,153.441 119.924,153.441 122.324,153.441 124.724,153.441 127.124,153.441 124.724,155.841 127.124,155.841 127.124,158.241 127.124,160.641
  other v5: 100.8,142.748
NetC17_1: C17.1 C28.1 C36.1 C39.1 C40.2 C41.2 L1B.5 L1B.6 L1B.7 L1B.8
  other v1: 160.6,147.4 162.8,147.4 160.6,149.6 162.8,149.6 136.4,151.8 138.6,151.8 140.8,151.8 143,151.8 145.2,151.8 147.4,151.8 149.6,151.8 151.8,151.8 154,151.8 156.2,151.8 158.4,151.8 160.6,151.8 162.8,151.8 136.4,154 138.6,154 140.8,154 136.4,156.2 138.6,156.2 140.8,156.2 136.4,158.4 138.6,158.4 136.4,160.6 138.6,160.6
  other v5: 161.5,142.748
NetC22_1: C22.1 R7.1 U1.26 | length 13.1
  Top Layer w0.399: C22.1 118.568,62.064 R7.1 v2(118.618,63.754) ; v2(121.92,65.786) 123.698,65.786 123.927,66.015 123.927,66.017 124.237,66.328 U1.26@124.237,67.789
  Bottom Layer w0.399: v2(118.618,63.754) 118.618,65.532 118.872,65.786 v2(121.92,65.786)
NetC23_1: C23.1 R8.1 U1.27 | length 8.8
  Top Layer w0.399: R8.1 123.14,62.114 C23.1 v2(123.19,63.246) ; v2(124.876,65.624) 125.037,65.785 U1.27@125.037,67.789
  Bottom Layer w0.399: v2(123.19,63.246) 123.19,63.938 v2(124.876,65.624)
NetC24_2: C24.2 D4.1 D4.2 R13.1 | length 6.6
  Top Layer w0.5: D4.1 110.236,86.233 ; D4.2 110.236,86.233 ; R13.1 112.942,83.87 C24.2 112.815,86.233 110.236,86.233
NetC25_2: C25.2 D5.1 D5.2 R14.1 | length 6.6
  Top Layer w0.5: D5.1 146.406,86.233 ; D5.2 146.406,86.233 ; R14.1@149.062,83.82 149.112,83.87 C25.2 148.985,86.233 146.406,86.233
NetC26_1: C26.1 R6.1 U1.25 | length 17.2
  Top Layer w0.399: R6.1 113.742,62.114 C26.1 v2(113.792,64.262) ; v2(119.652,67.8) U1.25@123.437,67.8 ; U1.25 U1.25@123.438,67.799
  Bottom Layer w0.399: v2(113.792,64.262) 113.792,64.344 113.943,64.494 113.943,64.536 114.176,64.77 117.368,64.77 117.602,65.004 117.602,67.584 117.836,67.818 119.634,67.818 v2(119.652,67.8)
NetC29_1: C29.1 R15.1 U1.28 | length 15.1
  Top Layer w0.399: v2(125.476,64.643) 125.838,65.005 U1.28 ; v2(131.064,67.31) 131.122,67.252 131.63,67.252 132.08,66.802 135.266,66.802 R15.1
  Bottom Layer w0.399: v2(125.476,64.643) 128.143,67.31 ; 128.651,67.31 128.143,67.31 ; v2(131.064,67.31) 128.143,67.31
NetC30_2: C30.2 P1.5 R16.1 U1.29 | length 33
  Top Layer w0.399: P1.5 R16.1 105.548,58.42 v2(110.49,58.42) ; v2(121.92,58.42) 121.929,58.429 v2@126.481,58.429 ; v2(126.481,63.627) 126.481,64.519 126.637,64.674 126.637,65.56 126.638,65.562 U1.29
  Bottom Layer w0.399: v2(110.49,58.42) v2(121.92,58.42) ; v2(126.481,58.42) v2(126.481,63.627)
NetC31_2: C31.2 Q6.4 | length 2.4
  Top Layer w0.55: Q6.4@109.082,69.165 C31.2@111.495,69.165
  Top Layer w0.6: C31.2@111.495,69.165 C31.2
NetC32_2: C32.2 R17.1 S1.2 U1.32 | length 25.4
  Top Layer w0.399: S1.2 126.238,48.514 126.63,48.906 R17.1 129.286,50.038 ; U1.32 129.038,64.51 v2(129.286,64.262) ; v2(129.286,53.848) 129.286,50.038 ; C32.2 129.286,50.038
  Bottom Layer w0.399: v2(129.286,53.848) v2(129.286,64.262)
NetC37_1: C37.1 R19.2 U1.19 | length 7.6
  Top Layer w0.399: R19.2 C37.1 U1.19
NetD1_1: D1.1 R18.1 | length 2.3
  Top Layer w0.6: R18.1 D1.1
NetD4_6: D4.6 R9.1 | length 7.3
  Top Layer w0.6: R9.1 108.966,95.758 108.204,94.996 108.204,92.456 108.712,91.948 D4.6
NetD4_12: D4.12 R1.1 | length 11
  Top Layer w0.5: D4.12 104.805,88.157 106.191,88.157 106.68,88.646 106.68,94.996 105.918,95.758 R1.1
NetD5_6: D5.6 R10.1 | length 7.3
  Top Layer w0.6: R10.1 145.136,95.758 144.374,94.996 144.374,92.456 144.882,91.948 D5.6
NetD5_12: D5.12 R2.1 | length 11
  Top Layer w0.5: D5.12 140.975,88.157 142.361,88.157 142.85,88.646 142.85,94.996 142.088,95.758 R2.1
NetP1_1: P1.1 U1.23 | length 33.4
  Top Layer w0.399: v2(108.204,60.96) 108.222,60.978 108.222,61.74 108.458,61.976 108.966,61.976 109.22,62.23 109.22,63.76 ; 109.226,63.76 109.651,64.185 110.84,64.185 111.138,64.483 111.138,64.782 v2(111.196,64.84) ; v2(116.47,69.48) 117.38,70.39 U1.23
  Bottom Layer w0.399: P1.1 100.33,58.674 100.584,58.42 107.696,58.42 108.204,58.928 v2(108.204,60.96) ; v2(111.196,64.84) 111.196,66.238 111.506,66.548 115.59,66.548 115.824,66.782 115.824,68.834 v2(116.47,69.48)
NetP1_3: P1.3 U1.24 | length 27.2
  Top Layer w0.399: v2(107.188,59.944) 109.728,59.944 110.025,60.241 110.025,63.035 110.376,63.386 111.819,63.386 112.44,64.008 v2(112.522,64.008) ; v2(119.38,69.088) 119.882,69.59 U1.24
  Bottom Layer w0.399: P1.3 104.219,59.611 106.773,59.611 107.106,59.944 v2(107.188,59.944) ; v2(112.522,64.008) 112.522,64.09 112.776,64.344 112.776,65.516 113.01,65.749 116.533,65.749 116.803,66.02 116.803,68.289 117.602,69.088 v2(119.38,69.088)
NetP1_4: P1.4 U1.22 | length 24.3
  Top Layer w0.399: P1.4 102.87,65.024 103.124,65.278 109.728,65.278 110.363,65.913 112.776,65.913 113.284,66.421 v2(113.284,67.559) ; v2(116.713,71.19) U1.22
  Bottom Layer w0.399: v2(113.284,67.559) 114.422,67.559 114.935,68.072 114.935,69.412 v2(116.713,71.19)
NetP5_3: P5.3 P6.3 U1.31 | length 20.3
  Top Layer w0.4: U1.31 128.238,63.119 135.89,63.119 P6.3 P5.3
NetP5_4: P5.4 P6.4 U1.30 | length 26.9
  Top Layer w0.399: 127.439,62.987 127.439,62.661 127.996,62.103 v2(134.493,62.103) ; 127.438,62.988 U1.30 ; v2(134.493,64.135) 137.541,64.135 138.43,63.246 P6.4 P5.4
  Bottom Layer w0.399: v2(134.493,62.103) v2(134.493,64.135)
NetP5_5: P5.5 U1.10 | length 38.2
  Top Layer w0.399: U1.10@128.239,76.991 128.239,78.755 128.478,78.994 v2(128.974,78.994) ; v2(131.064,78.994) 131.572,78.994 131.826,78.74 140.716,78.74 140.97,78.486 v2(140.97,65.786) ; P5.5 v2(140.97,63.754)
  Bottom Layer w0.399: v2(128.974,78.994) 129.032,78.994 v2(131.064,78.994) ; v2(140.97,63.754) v2(140.97,65.786)
NetP5_6: P5.6 U1.11 | length 43.5
  Top Layer w0.399: U1.11 127.438,79.686 127.762,80.01 v2(128.27,80.01) ; v2(132.08,80.01) 132.334,79.756 143.256,79.756 143.51,79.502 v2(143.51,65.786) ; P5.6 v2(143.51,63.754)
  Bottom Layer w0.399: v2(128.27,80.01) v2(132.08,80.01) ; v2(143.51,63.754) v2(143.51,65.786)
NetP5_7: P5.7 U1.2 | length 29.6
  Top Layer w0.399: U1.2@130.839,70.389 131.957,70.389 132.341,70.389 132.623,70.107 137.431,70.107 137.668,69.87 137.668,65.278 138.176,64.77 145.542,64.77 146.05,64.262 P5.7
NetQ1_4: Q1.4 R1.2 | length 9.6
  Top Layer w0.5: Q1.4 v3(105.918,108.204)
  Top Layer w1: R1.2 v3(105.918,101.6)
  Bottom Layer w1: v3(105.918,101.6) v3(105.918,108.204)
NetQ2_4: Q2.4 R2.2 | length 9.6
  Top Layer w0.5: Q2.4 v3(142.088,108.204)
  Top Layer w1: R2.2 v3(142.088,101.009)
  Bottom Layer w1: v3(142.088,101.009) v3(142.088,108.204)
NetQ3_4: Q3.4 R9.2 | length 15.5
  Top Layer w0.4: v3(108.458,113.792) 108.573,113.907 108.573,114.333 108.692,114.452 Q3.4
  Top Layer w1: R9.2 v3(108.966,101.531)
  Bottom Layer w1: v3(108.458,113.792) 108.966,113.284 v3(108.966,101.531)
NetQ4_4: Q4.4 R10.2 | length 15.6
  Top Layer w0.4: v3(144.628,113.792) 144.742,113.907 144.742,114.333 144.862,114.452 Q4.4
  Top Layer w1: R10.2 v3(145.136,101.009)
  Bottom Layer w1: v3(144.628,113.792) 145.161,113.259 145.161,101.034 v3(145.136,101.009)
NetR11_1: R11.1 R12.2 R19.1 | length 61.1
  Top Layer w0.399: R19.1 116.166,79.014 116.4,79.248 117.876,79.248 118.11,79.482 v2(118.11,80.046) ; v2(118.11,82.296) v2(123.698,82.296) ; v2(131.318,81.28) 131.826,81.788 151.638,81.788 157.734,87.884 R12.2 R11.1
  Bottom Layer w0.399: v2(118.11,80.046) v2(118.11,82.296) ; v2(123.698,82.296) 130.302,82.296 v2(131.318,81.28)
NetR13_2: R13.2 U1.1 | length 28.8
  Top Layer w0.399: R13.2 114.692,81.514 114.926,81.28 123.21,81.28 123.444,81.046 v2(123.444,78.994) ; v2(124.974,71.12) 128.778,71.12 129.039,70.859 129.039,69.942 129.39,69.591 129.719,69.591 U1.1
  Bottom Layer w0.399: v2(123.444,78.994) 123.444,77.216 123.825,76.835 124.968,75.692 124.968,71.126 v2(124.974,71.12)
NetR14_2: R14.2 U1.9 | length 23.4
  Top Layer w0.399: U1.9 U1.9@129.038,77.554 ; U1.9@129.039,77.555 129.625,77.555 130.048,77.978 130.048,78.419 130.048,81.788 130.847,82.587 143.547,82.587 144.526,83.566 R14.2
NetR15_2: R15.2 U2.7 | length 68.5
  Top Layer w0.6: R15.2 135.682,69.018 136.488,69.018 136.625,69.155 v2(136.652,69.155) ; v2(144.516,70.348) 144.536,70.368 144.937,70.368 145.288,70.719 145.288,79.248 145.796,79.756 153.081,79.756 160.782,87.457 v4(160.782,101.854) ; v4(164.084,112.268) 164.973,113.157 U2.7
  Bottom Layer w0.6: v2(136.652,69.155) 136.671,69.174 136.671,70.007 137.023,70.358 v2@144.526,70.358 ; v4(160.782,101.854) 160.782,108.966 163.322,111.506 v4(164.084,112.268)
NetR18_2: R18.2 U1.13 | length 8.1
  Top Layer w0.399: R18.2 124.968,81.514 125.202,81.28 125.604,81.28 125.838,81.046 U1.13
Therm1: pad.3@114.046,56.388 R3.1 R6.2 | length 6.6
  Top Layer w0.399: R6.2 R3.1 111.622,56.388 pad.3@114.046,56.388
Therm2: pad.4 R4.1 R7.2 | length 6.3
  Top Layer w0.399: R4.1 116.448,56.388 pad.4 R7.2
Therm3: pad.5 R5.1 R8.2 | length 6.6
  Top Layer w0.399: R8.2 R5.1 121.02,56.388 pad.5
VB1: C5.2 D2.2 D4.13 | length 5.5
  Top Layer w0.6: C5.2 103.319,86.284 103.903,86.868 D4.13
  Top Layer w1: D2.2 C5.2
VB2: C9.2 D3.2 D5.13 | length 5.5
  Top Layer w0.6: C9.2@138.156,86.284 139.489,86.284 140.073,86.868 D5.13
  Top Layer w1: D3.2 C9.2@138.156,86.284
X1: C20.2 U1.7 Y1.1 | length 19.3
  Top Layer w0.399: U1.7 132.317,74.389 132.538,74.168 137.18,74.168 137.414,73.934 137.414,71.422 137.716,71.12 138.85,71.12 C20.2 v2(138.938,67.818)
  Bottom Layer w0.399: Y1.1 138.252,64.846 138.938,65.532 v2(138.938,67.818)
X2: C21.2 U1.8 Y1.2 | length 5.7
  Top Layer w0.399: U1.8 v2(134.869,75.189)
  Bottom Layer w0.399: v2(134.869,75.189) 136.139,75.189 Y1.2@136.398,74.93
pads on no net: D4.8 D4.9 D4.10 D4.14 D5.8 D5.9 D5.10 D5.14 U1.3 U1.6 U1.12 U1.14 U1.15 U1.16 U1.17 U2.6

## Polygon pours and split planes (outlines as drawn)
D1 on Top Layer "D1_L01_P105" (solid, pour order 105): 96.774,132.461 97.536,133.223 130.048,133.223 130.937,132.334 130.937,126.365 130.048,125.476 97.409,125.476 96.774,126.111
D2 on Top Layer "D2_L01_P106" (solid, pour order 106): 165.862,126.746 164.592,125.476 133.858,125.476 133.096,126.238 133.096,132.461 133.985,133.35 164.846,133.35 165.862,132.334
NetC17_1 on Top Layer "NETC17_1_L01_P103" (solid, pour order 103): 133.223,163.322 133.731,163.83 141.351,163.83 141.859,163.322 141.859,155.321 142.621,154.559 165.227,154.559 165.989,153.797 165.989,140.462 165.354,139.827 159.258,139.827 133.727,139.827 132.993,140.568
NetC4_2 on Top Layer "NETC4_2_L01_P101" (solid, pour order 101): 122.428,163.322 122.936,163.83 130.556,163.83 131.064,163.322 131.064,140.589 130.302,139.827 103.124,139.827 97.282,139.827 96.774,140.335 96.774,153.924 97.409,154.559 121.793,154.559 122.428,155.194
Lpt2 on Top Layer "LPT2_L01_P086" (solid, pour order 86): 144.526,157.353 144.018,157.861 144.018,163.322 144.526,163.83 148.082,163.83 148.717,164.465 148.717,170.18 149.987,171.45 156.337,171.45 157.607,170.18 157.607,159.385 156.337,158.115 150.622,158.115 149.86,157.353
50V on Top Layer "50V_L01_P069" (solid, pour order 69): 164.592,124.079 166.37,125.857 166.37,131.572 167.513,132.715 174.879,132.715 176.022,131.572 176.022,113.792 173.228,110.998 173.228,102.108 172.212,101.092 164.338,101.092 163.957,101.473 163.957,102.997 164.338,103.378 165.354,103.378 167.64,103.378 168.402,104.14 168.402,116.332 164.592,120.142
3V3 on Top Layer "3V3_L01_P078" (solid, pour order 78): 129.54,45.212 176.022,45.212 176.022,81.788 96.266,81.788 96.266,45.212
GND on Top Layer "GND_L01_P099" (solid, pour order 99): 166.243,97.79 164.084,97.79 163.83,98.044 163.83,100.33 164.084,100.584 169.418,100.584 169.672,100.33 169.672,99.06 169.418,98.806 167.259,98.806
12V on Top Layer "12V_L01_P098" (solid, pour order 98): 163.322,97.282 163.576,97.536 166.624,97.536 167.386,98.298 169.164,98.298 169.672,97.79 169.672,94.488 169.164,93.98 167.132,93.98 166.37,93.218 166.37,90.424 165.862,89.916 163.83,89.916 163.322,90.424
Lpt1 on Top Layer "LPT1_L01_P089" (solid, pour order 89): 120.015,164.084 116.078,164.084 115.697,164.465 115.697,170.053 114.3,171.45 112.776,171.45 108.331,171.45 106.807,169.926 106.807,159.385 108.077,158.115 114.681,158.115 115.443,157.353 120.015,157.353 120.65,157.988 120.65,158.75 120.65,163.449
INP on Top Layer "INP_L01_P079" (solid, pour order 79): 166.37,150.495 167.513,151.638 174.498,151.638 176.022,150.114 176.022,137.541 174.625,136.144 167.513,136.144 166.37,137.287
GND on Top Layer "GND_L01_P061" (solid, pour order 61): 161.036,118.872 160.528,119.38 143.51,119.38 143.002,118.872 143.002,115.57 146.152,115.57 146.152,114.046 146.66,113.538 146.812,113.538 160.528,113.538 161.036,114.046
IP- on Top Layer "IP-_L01_P045" (solid, pour order 45): 155.448,124.46 163.576,124.46 164.084,123.952 164.084,120.396 163.576,119.888 143.002,119.888 142.24,119.126 142.24,110.744 141.732,110.236 136.144,110.236 135.636,110.744 135.636,119.126 134.874,119.888 125.73,119.888 106.68,119.888 106.172,119.38 106.172,110.998 105.41,110.236 100.076,110.236 99.314,110.998 99.314,123.698 100.076,124.46 147.574,124.46
GND on Top Layer "GND_L01_P077" (solid, pour order 77): 145.39,90.932 151.74,90.932 151.74,87.884 145.39,87.884
GND on Top Layer "GND_L01_P070" (solid, pour order 70): 109.22,90.932 115.57,90.932 115.57,87.884 109.22,87.884
GND on Top Layer "GND_L01_P046" (solid, pour order 46): 109.982,113.919 110.363,113.538 124.46,113.538 124.968,114.046 124.968,118.11 124.46,118.618 107.569,118.618 107.188,118.237 107.188,116.205 107.569,115.824 109.728,115.824 109.982,115.57 109.982,115.443
D1 on Top Layer "D1_L01_P048" (solid, pour order 48): 119.38,104.394 119.888,104.902 119.888,112.014 119.38,112.522 107.442,112.522 106.934,112.014 106.934,107.442 106.426,106.934 104.394,106.934 103.886,107.442 103.886,108.712 103.378,109.22 99.822,109.22 99.314,108.712 99.314,104.902 99.822,104.394
D2 on Top Layer "D2_L01_P062" (solid, pour order 62): 135.534,104.902 136.042,104.394 136.144,104.394 155.702,104.394 156.21,104.902 156.21,112.014 155.702,112.522 143.764,112.522 143.256,112.014 143.256,107.188 143.002,106.934 140.462,106.934 140.208,107.188 140.208,108.712 139.7,109.22 135.89,109.22 135.788,109.22 135.534,108.966
D2 on Bottom Layer "D2_L02_P066" (solid, pour order 66): 150.876,112.522 151.13,112.776 151.13,124.714 150.622,125.095 133.731,125.095 133.223,125.603 133.223,132.461 134.112,133.35 164.846,133.35 165.862,132.334 165.862,127.127 165.1,126.365 156.845,126.365 156.21,125.73 156.21,104.902 155.702,104.394 148.971,104.394 148.463,104.902 148.463,112.014 148.971,112.522
GND on Bottom Layer "GND_L02_P056" (solid, remove dead copper, pour order 56): 96.266,45.212 109.474,45.212 109.474,57.404 128.016,57.404 128.016,64.262 140.97,64.262 140.97,45.212 165.354,45.212 165.354,102.616 164.846,103.124 163.83,103.124 163.322,102.616 163.322,101.092 162.56,100.33 156.21,100.33 155.702,100.838 155.702,102.616 155.194,103.124 135.636,103.124 134.874,103.886 134.874,111.76 134.112,112.522 121.412,112.522 120.65,111.76 120.65,103.886 119.888,103.124 98.044,103.124 97.663,103.124 96.266,101.727
NetC17_1 on Bottom Layer "NETC17_1_L02_P104" (solid, pour order 104): 133.223,163.322 133.731,163.83 141.351,163.83 141.859,163.322 141.859,155.321 142.621,154.559 165.227,154.559 165.989,153.797 165.989,140.462 165.354,139.827 159.258,139.827 134.112,139.827 133.223,140.716
NetC4_2 on Bottom Layer "NETC4_2_L02_P102" (solid, pour order 102): 122.428,163.322 122.936,163.83 130.556,163.83 131.064,163.322 131.064,140.843 130.048,139.827 103.124,139.827 97.282,139.827 96.774,140.335 96.774,153.924 97.409,154.559 121.793,154.559 122.428,155.194
GND on Bottom Layer "GND_L02_P067" (solid, pour order 67): 149.987,124.079 150.622,123.444 150.622,114.046 150.114,113.538 119.888,113.538 119.38,114.046 119.38,122.936 120.523,124.079
Lpt2 on Bottom Layer "LPT2_L02_P093" (solid, pour order 93): 148.717,164.465 148.082,163.83 144.526,163.83 144.018,163.322 144.018,157.861 144.526,157.353 149.86,157.353 150.622,158.115 156.337,158.115 157.607,159.385 157.607,170.18 156.337,171.45 149.987,171.45 148.717,170.18 148.717,164.973
GND on Bottom Layer "GND_L02_P088" (solid, remove dead copper, pour order 88): 109.474,45.212 109.474,57.404 128.016,57.404 128.016,64.262 140.97,64.262 140.97,45.212
GND on Bottom Layer "GND_L02_P068" (solid, pour order 68): 157.734,124.079 165.227,124.079 166.37,125.222 166.37,156.718 167.64,157.988 174.371,157.988 176.022,156.337 176.022,143.383 176.022,45.212 163.322,45.212 163.322,107.95 165.608,110.236 165.608,112.522 164.592,113.538 157.226,113.538 156.718,114.046 156.718,123.063
Lpt1 on Bottom Layer "LPT1_L02_P094" (solid, pour order 94): 114.681,158.115 115.443,157.353 120.015,157.353 120.65,157.988 120.65,163.449 120.015,164.084 116.078,164.084 115.697,164.465 115.697,170.053 114.3,171.45 108.331,171.45 106.807,169.926 106.807,159.385 108.077,158.115
GND on Bottom Layer "GND_L02_P087" (solid, remove dead copper, pour order 87): 131.318,71.374 136.652,71.374 136.652,74.676 131.318,74.676
D1 on Bottom Layer "D1_L02_P065" (solid, pour order 65): 118.364,124.587 118.872,125.095 130.175,125.095 130.937,125.857 130.937,132.588 130.302,133.223 118.364,133.223 97.536,133.223 96.774,132.461 96.774,127.254 97.536,126.492 113.157,126.492 113.538,126.111 113.538,104.902 114.046,104.394 119.38,104.394 119.888,104.902 119.888,112.014 118.364,113.538

## Keep-outs
Keep-Out Layer:
  lines w0.254: 96.266,46.482 ccw(c97.536,46.482) 97.536,45.212 101.6,45.212 174.752,45.212 ccw(c174.752,46.482) 176.022,46.482 176.022,170.434 ccw(c174.752,170.434) 174.752,171.704 97.536,171.704 ccw(c97.536,170.434) 96.266,170.434 96.266,46.482

## Silkscreen, mask and mechanical layers (free items; w line width, h text height)
Top Overlay:
  drawing of 24 lines, arcs and shapes, not listed
  text "2020" at 169.707,53.721 h1.27
  text "Primary Converter" at 153.838,51.604 h1.27
  text "Sean McKeown &" at 157.012,49.403 h1.27
  text "Henry Mitchell-Hibbert" at 148.336,47.286 h1.27
Mechanical 1:
  lines w0.254: 96.266,46.482 ccw(c97.536,46.482) 97.536,45.212 101.6,45.212 174.752,45.212 ccw(c174.752,46.482) 176.022,46.482 176.022,170.434 ccw(c174.752,170.434) 174.752,171.704 97.536,171.704 ccw(c97.536,170.434) 96.266,170.434 96.266,46.482

## Text inside footprints (layer, text, board x,y; h text height)
P1: Top Overlay "1" at 97.79,60.198 h1.27; Top Overlay "2" at 97.536,62.992 h1.27; Top Overlay "5" at 106.934,60.452 h1.27; Top Overlay "6" at 106.934,62.992 h1.27